# EAGLE board theremin-oscillator (EAGLE 6.0)
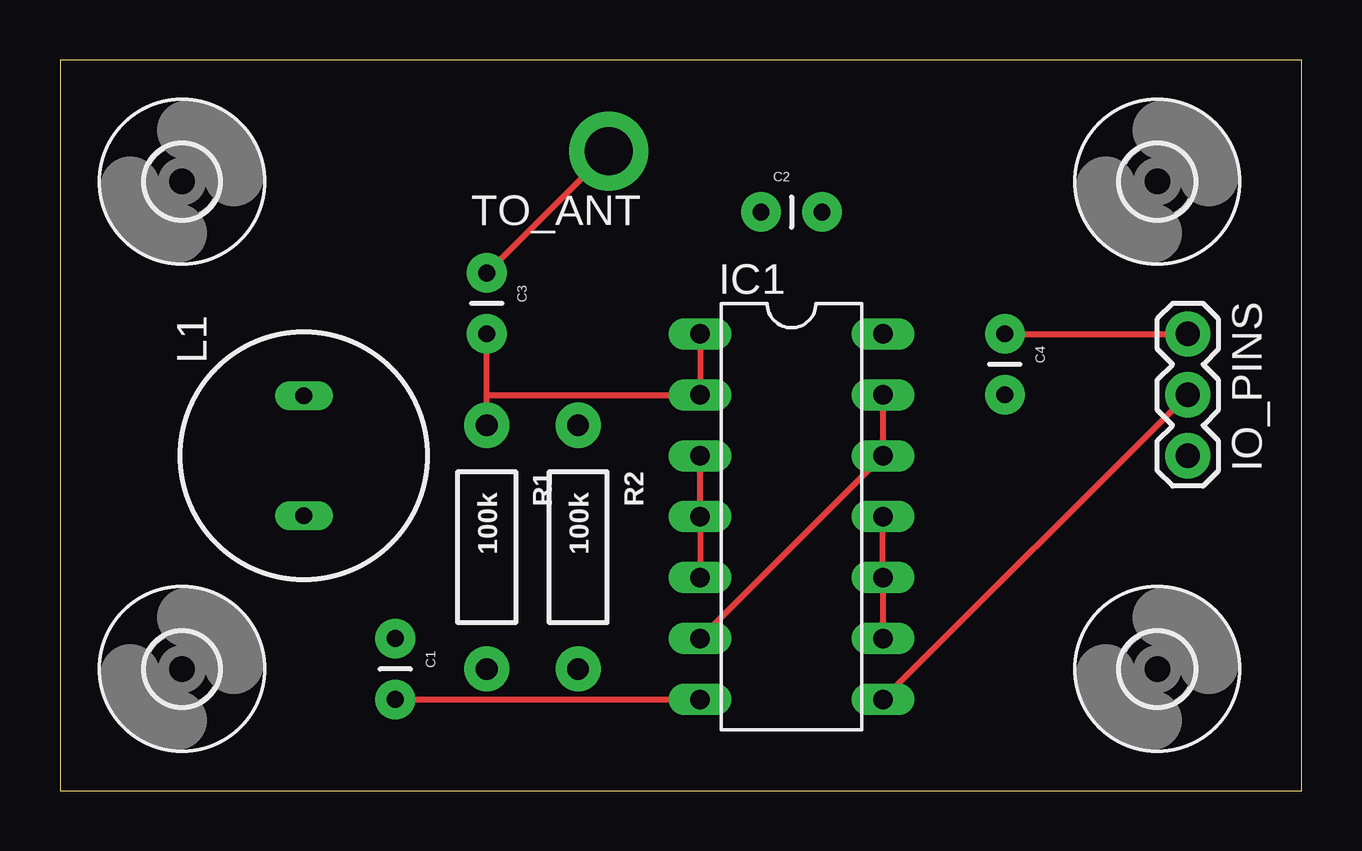
[diagram p0: board, top side]
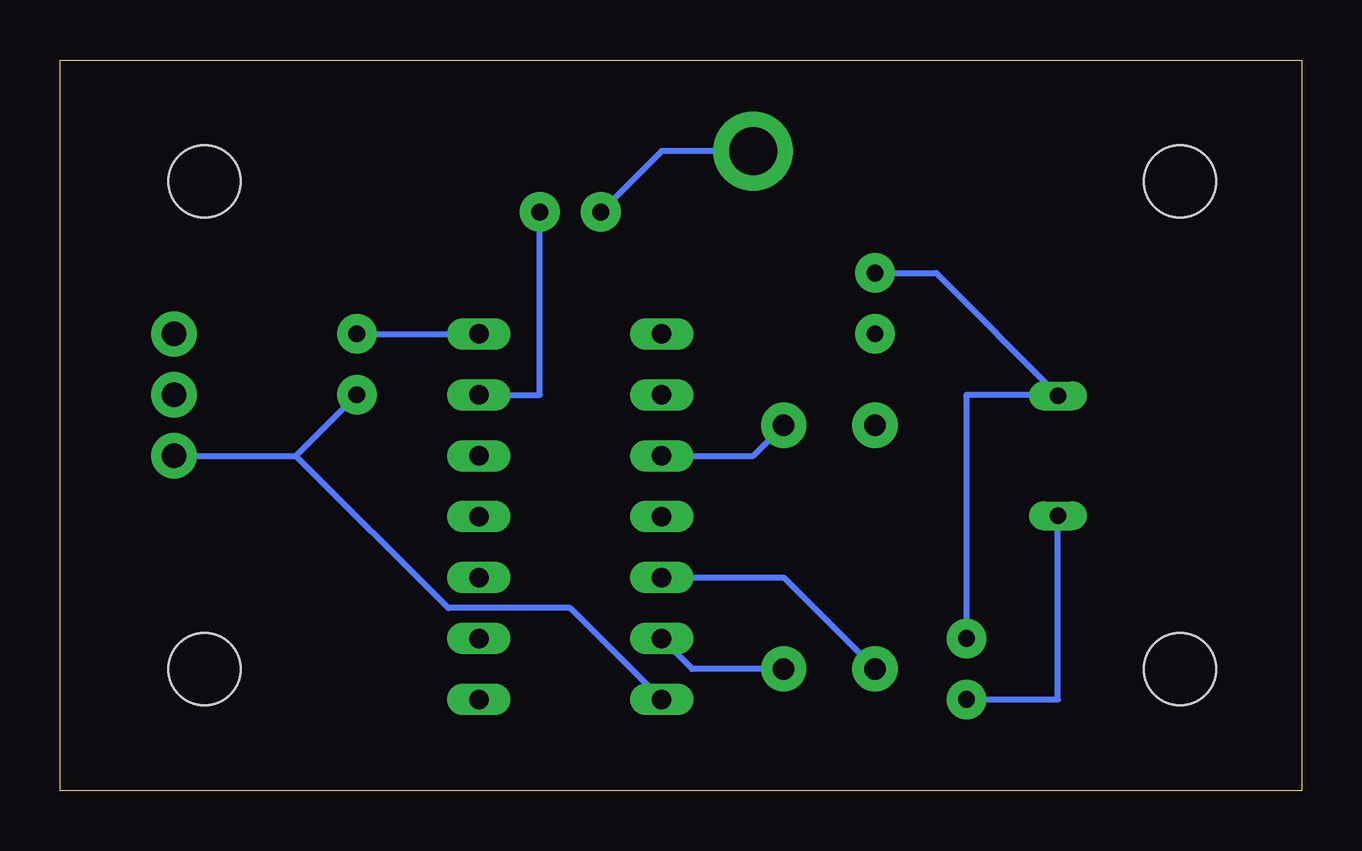
[diagram p1: board, bottom side, seen from below]

Size 51.74 x 30.47 mm. Coordinates in mm from the lower left corner, seen from the top.
Outline: 0,0 51.74,0 51.74,30.47 0,30.47 0,0
Copper layers (1*16): Top 0.035mm / dielectric 1.5mm / Bottom 0.035mm
Design rules: minimum track width 10mil, minimum drill 24mil, track to track 8mil, track to pad 8mil, pad to pad 8mil, via to via 8mil, smd to smd 8mil, copper to edge 40mil, drill to drill 8mil, minimum pad ring 10mil, minimum via ring 8mil, stop-mask expansion 4mil, vias tented up to drill 0mil, thermal gap 10mil

## Footprints (pad centres in the part's own frame; a part is rotated, then mirrored left to right if it is on the bottom)
CAP-PTH-SMALL = drill 0.7 pad 1.651: 1 0,0; 2 2.54,0
3,0 = hole 3: 0,0
DIL14 = drill 0.813 long: 1 -7.62,-3.81; 2 -5.08,-3.81; 3 -2.54,-3.81; 4 0,-3.81; 5 2.54,-3.81; 6 5.08,-3.81; 7 7.62,-3.81; 8 7.62,3.81; 9 5.08,3.81; 10 2.54,3.81; 11 0,3.81; 12 -2.54,3.81; 13 -5.08,3.81; 14 -7.62,3.81
1X03 = drill 1.016 pad 1.88: 1 0,0; 2 2.54,0; 3 5.08,0
BS11 = drill 0.7 long: 1 -2.5,0; 2 2.5,0
AXIAL-0.4 = drill 0.9 pad 1.88: P$1 -5.08,0; P$2 5.08,0
1X01_2MM = drill 2 pad 3.302: 1 0,0

## Placement (x,y rotation side)
C1  150p  [CAP-PTH-SMALL]  13.97,6.35 270 top
C2  10p  [CAP-PTH-SMALL]  29.21,24.13 0 top
C3  10p  [CAP-PTH-SMALL]  17.78,21.59 270 top
C4  100n  [CAP-PTH-SMALL]  39.37,19.05 270 top
H1  MOUNT-HOLE3.0  [3,0]  45.72,25.4 0 top
H2  MOUNT-HOLE3.0  [3,0]  45.72,5.08 0 top
H3  MOUNT-HOLE3.0  [3,0]  5.08,5.08 0 top
H4  MOUNT-HOLE3.0  [3,0]  5.08,25.4 0 top
IC1  74HC00N  [DIL14]  30.48,11.43 270 top
IO_PINS  PSG  [1X03]  46.99,19.05 270 top
L1  10u  [BS11]  10.16,13.97 90 top
R1  100k  [AXIAL-0.4]  17.78,10.16 270 top
R2  100k  [AXIAL-0.4]  21.59,10.16 270 top
TO_ANT  M01PTH_2MM  [1X01_2MM]  22.86,26.67 180 top

## Library data of the parts
C1-C4 IO_PINS R1 R2 TO_ANT = SparkFun
H1-H4 = holes
IC1 = 74xx-eu
L1 = inductor-neosid; OC_FARNELL: unknown; OC_NEWARK: unknown

## Nets
+5V: C4.1 IC1.14 IO_PINS.1
GND: C1.2 C4.2 IC1.7 IO_PINS.3 L1.1
N$1: C3.2 IC1.1 IC1.2 R1.P$1
N$2: IC1.3 IC1.4 IC1.5 R1.P$2 R2.P$1
N$4: C2.2 IC1.6 IC1.12 IC1.13 R2.P$2
N$5: C1.1 C2.1 C3.1 L1.2 TO_ANT.1
N$6: IC1.9 IC1.10 IC1.11
N$7: IC1.8 IO_PINS.2

## Tracks (layer width: path | path; a pad name or v marks a point on that pad's centre or on a via)
+5V
  Top 0.254: C4.1 IO_PINS.1
  Bottom 0.254: C4.1 IC1.14
GND
  Top 0.254: C1.2 IC1.7
  Bottom 0.254: 41.91,13.97 C4.2 | IO_PINS.3 41.91,13.97 | L1.1 10.16,3.81 C1.2 | 41.91,13.97 35.56,7.62 30.48,7.62 IC1.7
N$1
  Top 0.254: IC1.1 IC1.2 17.78,16.51 | R1.P$1 17.78,16.51 | 17.78,16.51 C3.2
N$2
  Top 0.254: IC1.5 IC1.4 IC1.3
  Bottom 0.254: R1.P$2 21.59,8.89 IC1.5 | R2.P$1 22.86,13.97 IC1.3
N$4
  Top 0.254: IC1.13 IC1.12 IC1.6
  Bottom 0.254: IC1.6 25.4,5.08 R2.P$2 | C2.2 31.75,16.51 IC1.13
N$5
  Top 0.254: C3.1 TO_ANT.1
  Bottom 0.254: C2.1 26.67,26.67 TO_ANT.1 | 10.16,16.51 15.24,21.59 C3.1 | C1.1 13.97,16.51 10.16,16.51 | 10.16,16.51 L1.2
N$6
  Top 0.254: IC1.9 IC1.10 IC1.11
N$7
  Top 0.254: IO_PINS.2 IC1.8